# Altium PCB SH-C31A-V1.1.PcbDoc
Units mm, origin at the board's own origin, x right, y up, seen from the top; angles counter-clockwise.
Board outline 54.15 x 24.36 mm, 2 copper layers (Top Layer, Bottom Layer), stack 1.58 mm thick; 39 components, 25 nets, 144 pads, 46 vias.
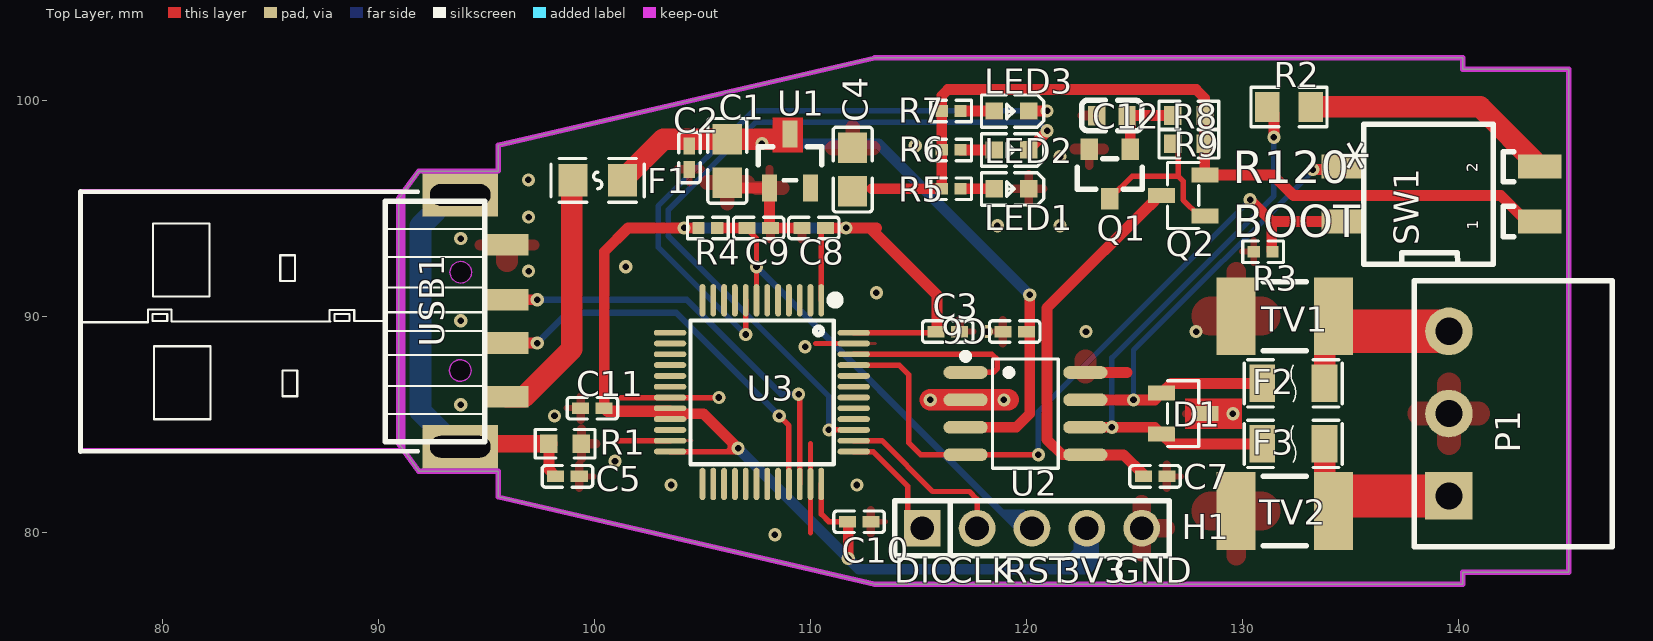
[diagram p0: Top Layer view]
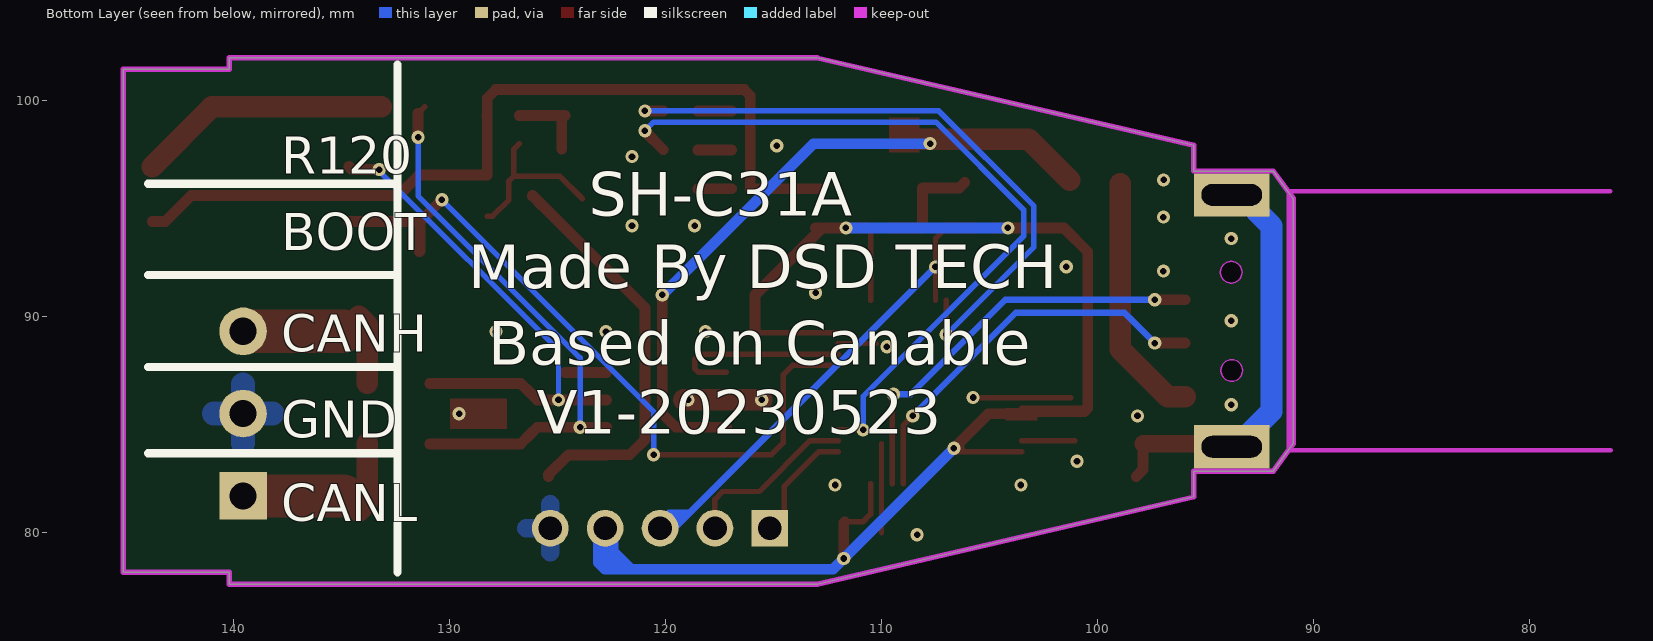
[diagram p1: Bottom Layer view, seen from below]

## Layer stack, top to bottom
Top Solder Mask Layer: solder mask 0.01, Dk 3.3
Top Layer: signal copper 0.035
Dielectric1: surface 1.51, FR4, Dk 4.5
Bottom Layer: signal copper 0.035
Bottom Solder Mask Layer: solder mask 0.01, Dk 3.3

## Board outline
90.964,84.111 90.964,95.464 91.879,96.734 95.562,96.734 95.562,97.928 112.986,101.967 113.901,101.967 140.215,101.967 140.215,101.433 145.117,101.433 145.117,78.167 140.215,78.167 140.215,77.608 112.986,77.608 95.562,81.647 95.562,82.841 91.879,82.841

## Design rules (kind name [scope] priority, off if disabled: settings)
BoardOutlineClearance Default [All] p0: genericclearance=0.254 ignorepadtopadclearanceinfootprint=FALSE except(0: Arc-SplitContinuation Track-SplitContinuation SMDPad-SplitContinuation THPad-SplitContinuation Via-SplitContinuation Fill-SplitContinuation Poly-SplitContinuation Region-SplitContinuation Text-SplitContinuation)
BoardOutlineClearance Plane_Default [All] p0: genericclearance=0.254 ignorepadtopadclearanceinfootprint=FALSE except(0: Arc-SplitContinuation Track-SplitContinuation SMDPad-SplitContinuation THPad-SplitContinuation Via-SplitContinuation Fill-SplitContinuation Poly-SplitContinuation Region-SplitContinuation Text-SplitContinuation)
BoardOutlineClearance Copper_gge7917 [All] p0: genericclearance=0.254 ignorepadtopadclearanceinfootprint=FALSE except(0: Arc-SplitContinuation Track-SplitContinuation SMDPad-SplitContinuation THPad-SplitContinuation Via-SplitContinuation Fill-SplitContinuation Poly-SplitContinuation Region-SplitContinuation Text-SplitContinuation)
BoardOutlineClearance Copper_gge7914 [All] p0: genericclearance=0.254 ignorepadtopadclearanceinfootprint=FALSE except(0: Arc-SplitContinuation Track-SplitContinuation SMDPad-SplitContinuation THPad-SplitContinuation Via-SplitContinuation Fill-SplitContinuation Poly-SplitContinuation Region-SplitContinuation Text-SplitContinuation)
BoardOutlineClearance otherClearance [All] p0: genericclearance=0.254 ignorepadtopadclearanceinfootprint=FALSE except(0: Arc-SplitContinuation Track-SplitContinuation SMDPad-SplitContinuation THPad-SplitContinuation Via-SplitContinuation Fill-SplitContinuation Poly-SplitContinuation Region-SplitContinuation Text-SplitContinuation)
Clearance Default [All] p1: gap=0.178 ignorepadtopadclearanceinfootprint=FALSE
Clearance Plane_Default [All] p1: gap=0.178 ignorepadtopadclearanceinfootprint=FALSE
Clearance Copper_gge7917 [All] p1: gap=0.178 ignorepadtopadclearanceinfootprint=FALSE
Clearance Copper_gge7914 [All] p1: gap=0.178 ignorepadtopadclearanceinfootprint=FALSE
Clearance otherClearance [All] p1: gap=0.178 ignorepadtopadclearanceinfootprint=FALSE
DiffPairsRouting differentialPair [All] p1: maxuncoupledlength=10 minlimit=6 maxlimit=Infinity mostfreqgap=6 toplayer_minwidth=5 toplayer_prefwidth=10 toplayer_maxwidth=100 bottomlayer_minwidth=5 bottomlayer_prefwidth=10 bottomlayer_maxwidth=100
PasteMaskExpansion pasteMaskExpansion [All] p1: expansion=0
PlaneConnect Default [All] p1: planeconnectstyle=Relief reliefexpansion=0.508 reliefentries=4 reliefconductorwidth=0 reliefairgap=0.254
PolygonConnect gge7917 [All] p1: connectstyle=Direct reliefentries=4 reliefconductorwidth=10 polygonreliefangle="90 Angle" airgapwidth=10
PolygonConnect gge7914 [All] p1: connectstyle=Relief reliefentries=4 reliefconductorwidth=0 polygonreliefangle="90 Angle" airgapwidth=10
RoutingVias Default [All] p1: viastyle="Through Hole" holewidth=12 minholewidth=12 maxholewidth=2362 width=12 minwidth=12 maxwidth=2362
SolderMaskExpansion solderMaskExpansion [IsVia] p1: useseparateexpansions=TRUE expansion=-1000 expansionbottom=-1000
SolderMaskExpansion solderMaskExpansion [All] p2: useseparateexpansions=TRUE expansion=4 expansionbottom=4
Width Default [All] p1: maxlimit=1000 minlimit=10 preferedwidth=10

## Components (designator, comment, footprint, x,y, rotation, side; value= is the part's Value field where it differs from the comment)
C1 "10uF" C0805_1 106.164,97.2 r90 top locked
C2 "100nF" C0402_2 104.409,97.355 r90 top locked
C3 "100nF" C0402_2 116.364,89.3 r180 top locked
C4 "10uF" C0805_1 111.964,96.8 r270 top locked
C5 "100nF" C0402_2 98.764,82.6 r180 top locked
C6 "100nF" C0402_2 119.464,89.3 r0 top locked
C7 "NC" C0402_2 125.964,82.6 r180 top locked
C8 "100nF" C0402_2 110.164,94.1 r0 top locked
C9 "100nF" C0402_2 107.614,94.1 r180 top locked
C10 "100nF" C0402_2 112.264,80.5 r180 top locked
C11 "100nF" C0402_2 99.919,85.755 r0 top locked
C12 "10uF" C0603_1 123.964,99.3 r0 top locked
D1 "" SOT-23-3_L2.9-W1.3-P1.90-LS2.4-BR 127.264,85.505 r180 top locked
F1 "" F0805 100.164,96.3 r0 top locked
F2 "SMD1206B020TF/24" F1206_1 132.364,86.905 r0 top locked
F3 "SMD1206B020TF/24" F1206_1 132.364,84.105 r0 top locked
H1 "" HDR-TH_5P-P2.54-V-M 120.264,80.2 r0 top locked
LED1 "" LED0603-RD_RED_1 119.32,95.911 r180 top locked
LED2 "" LED0603-RD 119.32,97.711 r180 top locked
LED3 "" LED0603-RD 119.32,99.511 r180 top locked
P1 "WJ15EDGRC-3.81-3P" CONN-TH_3P-P3.81_WJ15EDGRC-3.81-3P 139.564,85.505 r90 top locked
Q1 "S8050" SOT-23_L2.9-W1.3-P1.90-LS2.4-BR 123.864,96.6 r90 top locked
Q2 "SI2301" SOT-23-3_L2.9-W1.3-P1.90-LS2.4-BR_2 127.264,95.6 r0 top locked
R1 "" R0603 98.657,84.107 r180 top locked
R2 "" R0805 132.164,99.7 r0 top locked
R3 "" R0402 130.964,93 r0 top locked
R4 "" R0402 105.264,94.1 r180 top locked
R5 "" R0402 116.52,95.911 r0 top locked
R6 "" R0402 116.52,97.711 r0 top locked
R7 "" R0402 116.52,99.511 r0 top locked
R8 "" R0603 127.531,99.3 r0 top locked
R9 "100kΩ" R0603 127.531,98 r0 top locked
SW1 "" SW-SMD_4P-L6.5-W6.0-P2.54-LS9.8 139.217,95.667 r90 top locked
TV1 "" DIO-DT-SMD_L4.5-W3.2 131.964,90.015 r180 top locked
TV2 "" DIO-DT-SMD_L4.5-W3.2 131.964,80.995 r180 top locked
U1 "ME6209A33M3G" SOT-23(SOT-23-3) 109.064,97.2 r0 top locked
U2 "TJA1051T/3,118" SOIC-8_L4.9-W3.9-P1.27-LS6.0-BL 119.964,85.505 r270 top locked
U3 "STM32G431C8T6TR" LQFP-48_L7.0-W7.0-P0.50-LS9.0-BL_1 107.764,86.5 r180 top locked
USB1 "" USB-A-SMD_U-G-04WS-W-01 94.884,89.8 r180 top locked

## Footprints (in the part's own frame and the unit in brackets; to place one, negate y for a bottom-side part, rotate by r counter-clockwise, add the part's x,y. Pads: shape width x height; smd on the part's side, far side on the other; paste and mask are expansions set on the pad)
C0402_2 [mm]
  rect 0.79x0.54 smd paste-100 mask+0.051: 1(-0.545,0) 2(0.545,0)
  silkscreen extent -1.17,-0.5 1.17,0.5
C0603_1 [mm]
  rect 0.8x0.9 smd paste+0 mask+0.051: 1(-0.7,0) 2(0.7,0)
  silkscreen extent -1.41,-0.71 1.39,0.72
C0805_1 [mm]
  rect 1.41x1.35 smd paste-100 mask+0.051: 1(-1,0) 2(1,0)
  silkscreen extent -1.96,-0.9 1.96,0.9
CONN-TH_3P-P3.81_WJ15EDGRC-3.81-3P [mm]
  rect 2.2x2.2 hole 1.26 paste+0 mask+0.051: 1(-3.81,0)
  round 2.2 hole 1.26 paste+0 mask+0.051: 2(0,0) 3(3.81,0)
  silkscreen extent -6.15,-7.55 6.15,1.6
DIO-DT-SMD_L4.5-W3.2 [mm]
  rect 1.8x3.6 smd paste+0 mask+0.051: 1(-2.25,0) 2(2.25,0)
  silkscreen extent -1,-1.6 1,1.6
F0805 [mm]
  rect 1.335x1.5 smd paste-100 mask+0.051: 1(-1.142,0) 2(1.142,0)
  silkscreen extent -2.16,-1.02 2.16,1.02
F1206_1 [mm]
  rect 1.19x1.728 smd paste+0 mask+0.051: 1(-1.445,0) 2(1.445,0)
  silkscreen extent -2.27,-1.09 2.27,1.09
HDR-TH_5P-P2.54-V-M [mm]
  rect 1.7x1.7 hole 1.1 paste+0 mask+0.051: 1(-5.08,0)
  round 1.7 hole 1.1 paste+0 mask+0.051: 2(-2.54,0) 3(0,0) 4(2.54,0) 5(5.08,0)
  silkscreen extent -6.35,-1.27 6.35,1.27
LED0603-RD [mm]
  rect 0.8x0.8 smd paste+0 mask+0.051: 1(-0.799,-0.003) 2(0.799,0.003)
  silkscreen extent -1.49,-0.75 1.39,0.76
LED0603-RD_RED_1 [mm]
  rect 0.8x0.8 smd paste+0 mask+0.051: 1(-0.8,-0.003) 2(0.8,0.003)
  silkscreen extent -1.49,-0.75 1.39,0.76
LQFP-48_L7.0-W7.0-P0.50-LS9.0-BL_1 [mm]
  oval 0.27x1.5 smd paste+0 mask+0.05: 1(-2.75,-4.25) 2(-2.25,-4.25) 3(-1.75,-4.25) 4(-1.25,-4.25) 5(-0.75,-4.25) 6(-0.25,-4.25) 7(0.25,-4.25) 8(0.75,-4.25) 9(1.25,-4.25) 10(1.75,-4.25) 11(2.25,-4.25) 12(2.75,-4.25) 25(2.75,4.25) 26(2.25,4.25) 27(1.75,4.25) 28(1.25,4.25) 29(0.75,4.25) 30(0.25,4.25) 31(-0.25,4.25) 32(-0.75,4.25) 33(-1.25,4.25) 34(-1.75,4.25) 35(-2.25,4.25) 36(-2.75,4.25)
  oval 1.5x0.27 smd paste+0 mask+0.05: 13(4.25,-2.75) 14(4.25,-2.25) 15(4.25,-1.75) 16(4.25,-1.25) 17(4.25,-0.75) 18(4.25,-0.25) 19(4.25,0.25) 20(4.25,0.75) 21(4.25,1.25) 22(4.25,1.75) 23(4.25,2.25) 24(4.25,2.75) 37(-4.25,2.75) 38(-4.25,2.25) 39(-4.25,1.75) 40(-4.25,1.25) 41(-4.25,0.75) 42(-4.25,0.25) 43(-4.25,-0.25) 44(-4.25,-0.75) 45(-4.25,-1.25) 46(-4.25,-1.75) 47(-4.25,-2.25) 48(-4.25,-2.75)
  silkscreen extent -3.59,-4.46 3.3,3.34
R0402 [mm]
  rect 0.566x0.54 smd paste-100 mask+0.051: 1(-0.433,0) 2(0.433,0)
  silkscreen extent -0.94,-0.5 0.94,0.5
R0603 [mm]
  rect 0.806x0.864 smd paste-100 mask+0.051: 1(-0.753,0) 2(0.753,0)
  silkscreen extent -1.39,-0.66 1.39,0.66
R0805 [mm]
  rect 1.133x1.377 smd paste-100 mask+0.051: 1(-1,0) 2(1,0)
  silkscreen extent -1.76,-0.92 1.76,0.92
SOIC-8_L4.9-W3.9-P1.27-LS6.0-BL [mm]
  oval 0.588x2.045 smd paste+0 mask+0.051: 1(-1.905,-2.772) 2(-0.635,-2.772) 3(0.635,-2.772) 4(1.905,-2.772) 5(1.905,2.772) 6(0.635,2.772) 7(-0.635,2.772) 8(-1.905,2.772)
  silkscreen extent -2.8,-2.92 2.53,1.52
SOT-23(SOT-23-3) [mm]
  rect 0.7x1.25 smd paste+0 mask+0.102: 1(-0.95,-1.25) 2(0.95,-1.25) 3(0,1.25)
  silkscreen extent -1.46,-0.9 1.46,0.65
SOT-23-3_L2.9-W1.3-P1.90-LS2.4-BR [mm]
  rect 1.25x0.7 smd paste+0 mask+0.051: 1(1,-0.95) 2(1,0.95) 3(-1,0)
  silkscreen extent -0.73,-1.53 0.73,1.53
SOT-23-3_L2.9-W1.3-P1.90-LS2.4-BR_2 [mm]
  rect 1.25x0.7 smd paste+0 mask+0.051: 1(1,-0.95) 2(1,0.95) 3(-1,0)
  silkscreen extent -0.73,-1.53 0.73,1.53
SOT-23_L2.9-W1.3-P1.90-LS2.4-BR [mm]
  rect 1x0.8 smd paste+0 mask+0.051: 1(1.15,-0.95) 2(1.15,0.95) 3(-1.15,0)
  silkscreen extent -0.7,-1.5 0.7,1.5
SW-SMD_4P-L6.5-W6.0-P2.54-LS9.8 [mm]
  rect 1.1x2 smd paste+0 mask+0.051: 1(-1.27,-4.55) 2(1.27,-4.55) 3(1.27,4.55) 4(-1.27,4.55)
  silkscreen extent -3.24,-3.35 3.24,3.6
USB-A-SMD_U-G-04WS-W-01 [mm]
  rect 2x1 smd paste-100 mask+0.051: 1(-1.082,3.518) 2(-1.082,1.029) 3(-1.082,-0.978) 4(-1.082,-3.518)
  rect 3.5x2 hole 1 slot 2.8 at 0 deg paste+0 mask+0.051: 5(1.082,5.829) 6(1.082,-5.829)
  Board Outline Layer circle w0.003: c1.082,2.299 r0.5
  Board Outline Layer circle w0.003: c1.057,-2.248 r0.5
  Board Outline Layer lines w0.2: 18.625,5.994 3.715,5.994 3.715,-5.994 18.599,-5.994
  Board Outline Layer region: 0.582,2.299 0.631,2.516 0.77,2.69 0.971,2.786 1.193,2.786 1.394,2.69 1.532,2.516 1.582,2.299 1.582,2.299 1.532,2.082 1.394,1.908 1.193,1.811 0.971,1.811 0.77,1.908 0.631,2.082 0.582,2.299
  Board Outline Layer region: 0.582,2.299 0.592,2.397 0.62,2.49 0.666,2.577 0.728,2.653 0.804,2.715 0.891,2.761 0.984,2.789 1.082,2.799 1.179,2.789 1.273,2.761 1.36,2.715 1.435,2.653 1.498,2.577 1.544,2.49 1.572,2.397 1.582,2.299 1.572,2.201 1.544,2.108 1.498,2.021 1.435,1.945 1.36,1.883 1.273,1.837 1.179,1.809 1.082,1.799 0.984,1.809 0.891,1.837 0.804,1.883 0.728,1.945 0.666,2.021 0.62,2.108 0.592,2.201
  Board Outline Layer region: 0.557,-2.248 0.606,-2.031 0.745,-1.857 0.945,-1.76 1.168,-1.76 1.368,-1.857 1.507,-2.031 1.557,-2.248 1.557,-2.248 1.507,-2.465 1.368,-2.639 1.168,-2.735 0.945,-2.735 0.745,-2.639 0.606,-2.465 0.557,-2.248
  Board Outline Layer region: 0.557,-2.248 0.566,-2.15 0.595,-2.056 0.641,-1.97 0.703,-1.894 0.779,-1.832 0.865,-1.786 0.959,-1.757 1.057,-1.748 1.154,-1.757 1.248,-1.786 1.334,-1.832 1.41,-1.894 1.472,-1.97 1.518,-2.056 1.547,-2.15 1.557,-2.248 1.547,-2.345 1.518,-2.439 1.472,-2.525 1.41,-2.601 1.334,-2.663 1.248,-2.71 1.154,-2.738 1.057,-2.748 0.959,-2.738 0.865,-2.71 0.779,-2.663 0.703,-2.601 0.641,-2.525 0.595,-2.439 0.566,-2.345
  Multi-Layer board cut-out: 0.582,2.299 0.631,2.516 0.77,2.69 0.971,2.786 1.193,2.786 1.394,2.69 1.532,2.516 1.582,2.299 1.582,2.299 1.532,2.082 1.394,1.908 1.193,1.811 0.971,1.811 0.77,1.908 0.631,2.082 0.582,2.299
  Multi-Layer board cut-out: 0.557,-2.248 0.606,-2.031 0.745,-1.857 0.945,-1.76 1.168,-1.76 1.368,-1.857 1.507,-2.031 1.557,-2.248 1.557,-2.248 1.507,-2.465 1.368,-2.639 1.168,-2.735 0.945,-2.735 0.745,-2.639 0.606,-2.465 0.557,-2.248
  silkscreen extent -0.06,-5.97 18.68,6.03

## Via types
v1: diameter 0.61, hole 0.305, Top Layer to Bottom Layer, 46 vias

## Nets (pads, with @x,y where several pads share a name; then routed paths per layer and width w, separated by ;. In a path a pad name is that pad's centre, name@x,y a point inside that pad or via, vN(x,y) a via of type N, cw(c..) or ccw(c..) an arc to the next point about the centre after c; other vN are vias at no path point)
$C5_2: C5.2 R1.2 USB1.5 USB1.6 | length 19.3
  Top Layer w0.5: R1.2 97.904,82.915 C5.2
  Top Layer w0.8: USB1.5 93.939,84.107 R1.2
  Bottom Layer w1.016: USB1.5 93.602,83.971 91.964,85.609 91.964,94.191 93.402,95.629 USB1.6
$C12_2: C12.2 Q1.1 R8.1 | length 3.7
  Top Layer w0.5: Q1.1 124.814,99.15 C12.2 R8.1
$F2_2: F2.2 P1.3 TV1.1 | length 7.8
  Top Layer w1: F2.2 133.809,89.61 TV1.1
  Top Layer w2: TV1.1@134.914,89.315 P1.3@139.464,89.315
$F3_2: F3.2 P1.1 TV2.1 | length 7.8
  Top Layer w1: F3.2 133.809,81.4 TV2.1
  Top Layer w2: TV2.1@134.914,81.695 P1.1@139.464,81.695
$LED1_2: LED1.2 R5.2 | length 1.6
  Top Layer w0.5: R5.2 118.517,95.911 LED1.2
$LED2_2: LED2.2 R6.2 | length 1.6
  Top Layer w0.5: R6.2 118.517,97.711 LED2.2
$LED3_2: LED3.2 R7.2 | length 1.6
  Top Layer w0.5: R7.2 116.956,99.507 LED3.2
$Q1_3: Q1.3 Q2.1 R9.1 | length 7.7
  Top Layer w0.254: Q1.3 124.914,96.5 127.031,96.5 ; R9.1 127.031,97.746 127.031,96.5 ; Q2.1 128.014,94.65 127.264,95.4 127.264,96.267 127.031,96.5
$R2_2: R2.2 SW1.2 | length 11.7
  Top Layer w1: R2.2 141.004,99.7 SW1.2
+3V3: C3.2 C4.2 C8.2 C10.2 C11.2 H1.4 Q2.2 R4.2 R5.1 R6.1 R7.1 R8.2 R9.2 SW1.1 U1.2 U3.1 U3.20 U3.21 U3.24 U3.36 U3.48 | length 120.6
  Top Layer w0.254: C11.2@100.469,85.75 U3.20 ; U3.24 106.181,83.75 ; 106.289,84.275 106.289,83.858 106.181,83.75 ; v1(106.664,83.9) 106.514,83.75 106.181,83.75 ; U3.36 110.514,80.85 110.864,80.5 C10.2 ; U3.1 110.514,93.905 C8.2 ; U3.48 C3.2@115.714,89.25
  Top Layer w0.5: 102.964,85.6 100.619,85.6 100.469,85.75 C11.2 100.464,93 101.564,94.1 v1(104.164,94.1) R4.2 ; 103.564,85.5 105.064,85.5 106.289,84.275 v1(106.664,83.9) ; C8.2 v1(111.664,94.1) 112.764,94.1 ; C10.2 111.764,80.455 v1(111.764,78.8) ; 112.864,95.911 R5.1 R6.1 R7.1 116.087,100.218 116.369,100.5 127.864,100.5 128.264,100.1 R8.2@128.264,99.28 ; 113.064,94.1 112.764,94.1 ; C3.2 115.864,89.345 115.864,91 112.764,94.1 ; R8.2 R8.2@128.264,99.28 ; SW1.1 143.167,94.397 141.964,95.6 132.364,95.6 131.414,96.55 Q2.2 R8.2@128.264,99.28
  Bottom Layer w0.5: v1(104.164,94.1) v1(111.664,94.1) ; v1(106.664,83.9) v1(111.764,78.8) 112.264,78.3 121.605,78.3 ; 121.605,78.3 122.066,78.761 ; 121.605,78.3 122.066,78.3 ; 122.066,78.3 122.428,78.3 ; 122.066,78.3 122.066,78.761 ; 122.066,78.761 122.428,79.123 ; 122.428,78.3 122.807,78.3 ; 122.428,78.3 122.428,79.123 ; 122.428,79.123 122.804,79.499 H1.4@122.804,80.1 ; 122.428,79.123 H1.4@122.428,79.724 ; H1.4@122.428,79.724 122.428,79.824 H1.4 ; H1.4@122.428,79.724 H1.4@122.804,80.1 ; H1.4@122.804,80.1 122.807,80.097 122.807,78.3 ; H1.4@122.804,80.1 H1.4 ; H1.4 123.124,79.88 123.124,78.616 122.807,78.3
+3V3A: C7.2 Q2.3 U2.5 | length 19.7
  Top Layer w0.254: 125.793,95.229 125.793,95.029 126.264,95.5 Q2.3 Q2.3@126.164,95.6
  Top Layer w0.5: U2.5 121.664,83.6 120.964,84.3 120.964,90.4 Q2.3@126.164,95.6
  Top Layer w0.508: U2.5 124.501,83.6 125.419,82.682 C7.2
+5V: C1.2 C2.2 C6.2 F1.2 U1.3 U2.3 | length 32.7
  Top Layer w0.5: U2.3 119.534,84.87 120.164,85.5 v1(120.164,91)
  Top Layer w1: F1.2 103.207,98.2 C1.2 107.764,98.2 108.814,98.2 U1.3
  Bottom Layer w0.5: v1(107.764,98) 113.164,98 v1(120.164,91)
CAN_H: D1.1 F2.1 SW1.3 U2.7 | length 24.1
  Top Layer w0.5: U2.7 v1(124.964,86.14) 125.949,86.14 D1.1 126.714,86.905 F2.1
  Top Layer w0.508: v1(133.264,96.8) 134.53,96.8 SW1.3
  Bottom Layer w0.254: v1(124.964,86.14) 124.964,88.439 133.264,96.739 v1(133.264,96.8)
CAN_L: D1.2 F3.1 R2.1 U2.6 | length 26.6
  Top Layer w0.254: R2.1 R2.1@131.464,99.4
  Top Layer w0.5: U2.6 v1(123.964,84.87) 125.949,84.87 D1.2 126.714,84.105 F3.1
  Top Layer w0.508: v1(131.464,98.3) R2.1@131.464,99.4
  Bottom Layer w0.254: v1(123.964,84.87) 123.964,88.086 131.464,95.586 v1(131.464,98.3)
CAN_RXD: R3.2 SW1.4 U2.4 U3.45 | length 34.1
  Top Layer w0.254: U3.45 114.114,87.75 114.564,87.3 114.564,84.154 115.118,83.6 U2.4 v1(120.564,83.6)
  Top Layer w0.5: v1(130.364,95.4) 131.367,94.397 ; R3.2 131.367,93.03 131.367,94.397 ; SW1.4 131.367,94.397
  Bottom Layer w0.254: v1(120.564,83.6) 120.564,85.6 v1(130.364,95.4)
CAN_TXD: U2.1 U3.46 | length 8.7
  Top Layer w0.254: U3.46 118.414,88.25 118.664,88 118.664,87.6 118.474,87.41 U2.1
GND: C1.1 C2.1 C3.1 C4.1 C5.1 C6.1 C7.1 C8.1 C9.1 C10.1 C11.1 C12.1 D1.3 H1.5 LED1.1 P1.2 Q1.2 R1.1 R3.1 TV1.2 TV2.2 U1.1 U2.2 U2.8 U3.19 U3.23 U3.35 U3.47 USB1.4 | length 23.9
  Top Layer w0.254: 101.064,84.25 U3.23 ; 101.264,86.25 U3.19 v1@105.964,86.25 ; 110.014,80 U3.35 110.014,84.1 ; 110.264,88.75 U3.47
  Top Layer w0.5: C1.1 106.414,95.95 U1.1 108.114,94.145 C9.1 C8.1 ; U2.8 124.664,87.41
  Top Layer w1: v1(115.553,86.14) U2.2 v1@119.164,86.14
  other v1: 108.364,79.9 103.564,82.2 112.164,82.2 100.964,83.3 98.164,85.4 129.564,85.5 93.828,85.917 118.964,86.14 105.774,86.25 109.764,88.6 118.164,89.3 122.764,89.3 127.864,89.3 93.824,89.8 113.064,91.1 96.964,92.1 101.464,92.3 93.828,93.607 118.664,94.2 121.564,94.2 96.964,94.6 96.954,96.32 121.564,97.4 114.864,97.9
JL-SWCLK: H1.2 U3.38 | length 8.2
  Top Layer w0.254: U3.38 113.316,84.25 115.666,81.9 117.364,81.9 117.724,81.54 H1.2
JL-SWDIO: H1.1 U3.37 | length 5.6
  Top Layer w0.254: U3.37 112.914,83.75 114.514,82.15 114.514,80.55 114.864,80.2 H1.1
LED1: LED2.1 U3.39 | length 35
  Top Layer w0.254: v1(110.864,84.75) U3.39
  Top Layer w0.5: LED2.1 120.964,98.559 v1(120.964,98.6)
  Bottom Layer w0.254: v1@110.864,84.8 110.864,86.3 103.429,93.735 103.429,94.933 107.497,99 120.564,99 v1(120.964,98.6)
LED2: LED3.1 U3.8 | length 29.8
  Top Layer w0.254: v1@107.014,89.292 U3.8
  Top Layer w0.5: LED3.1 v1(120.964,99.514)
  Bottom Layer w0.254: v1(107.014,89.165) 102.964,93.215 102.964,95.114 107.364,99.514 v1(120.964,99.514)
NRST: C9.2 H1.3 R4.1 U3.7 | length 25.5
  Top Layer w0.254: C9.2@107.019,94.109 107.028,94.1 107.514,93.614 v1(107.514,92.296) U3.7
  Top Layer w0.5: R4.1 107.028,94.1 C9.2
  Bottom Layer w0.3: v1(107.514,92.296) 118.905,80.905 ; H1.3@120.264,80.274 H1.3 ; 118.905,80.905 119.204,80.607 ; 118.905,80.905 119.858,80.905 H1.3@119.858,80.607 ; 119.204,80.607 H1.3@119.858,80.607 ; 119.204,80.607 119.937,79.873 H1.3 ; H1.3@119.858,80.607 H1.3
USBDM: U3.33 USB1.2 | length 18.5
  Top Layer w0.254: v1(108.564,85.4) 109.014,84.95 U3.33
  Top Layer w0.5: USB1.2 v1(97.364,88.771)
  Bottom Layer w0.3: v1(97.364,88.771) 98.764,90.171 103.796,90.171 108.564,85.403 v1(108.564,85.4)
USBDP: U3.34 USB1.3 | length 19.5
  Top Layer w0.254: v1(109.464,86.4) 109.514,86.35 U3.34
  Top Layer w0.5: USB1.3 v1(97.364,90.778)
  Bottom Layer w0.3: v1(97.364,90.778) 104.286,90.778 108.664,86.4 v1(109.464,86.4)
VBUS: F1.1 USB1.1 | length 11.6
  Top Layer w1: USB1.1 96.766,86.282 98.964,88.48 F1.1@98.964,96.143
pads on no net: U3.2 U3.3 U3.4 U3.5 U3.6 U3.9 U3.10 U3.11 U3.12 U3.13 U3.14 U3.15 U3.16 U3.17 U3.18 U3.22 U3.25 U3.26 U3.27 U3.28 U3.29 U3.30 U3.31 U3.32 U3.40 U3.41 U3.42 U3.43 U3.44

## Polygon pours and split planes (outlines as drawn)
+3V3 on Top Layer (solid, remove dead copper, pour order 0): 109.564,96.7 113.564,96.7 113.764,96.5 113.764,93.4 113.664,93.3 110.464,93.3 110.264,93.5 110.264,94.8 110.064,95 109.464,95 109.364,95.1 109.364,96.5
GND on Bottom Layer (solid, remove dead copper, pour order 6): 91.063,102.401 91.063,77.601 144.962,77.601 144.962,102.401
GND on Top Layer (solid, remove dead copper, pour order 4): 90.864,102 90.864,76.2 145.164,76.2 145.164,102

## Keep-outs
Board Outline Layer:
  the board outline again, w0.254

## Other copper
Top Layer:
  region net +3V3: 102.808,85.75 102.808,85.197 104.264,85.197 104.264,85.75
  region net +5V: 108.264,99.2 108.264,97.6 109.664,97.6 109.664,99.2
  region net GND: 127.364,86.187 127.364,84.8 129.964,84.8 129.964,86.187

## Silkscreen, mask and mechanical layers (free items; w line width, h text height)
Top Silkscreen Layer:
  text "R120" at 129.567,96.167 h1.5
  text "BOOT" at 129.567,93.667 h1.5
  text "DIO" at 113.897,77.672 h1.14
  text "CLK" at 116.437,77.672 h1.14
  text "RST" at 118.977,77.672 h1.14
  text "3V3" at 121.517,77.672 h1.14
  text "GND" at 124.057,77.672 h1.14
Bottom Silkscreen Layer:
  lines w0.381: 132.417,78.167 132.417,101.667 ; 132.514,83.667 143.964,83.667 ; 132.514,87.667 143.964,87.667 ; 132.514,91.92 143.964,91.92 ; 132.514,96.146 143.964,96.146
  text "R120" at 137.794,96.617 h1.7
  text "SH-C31A" at 123.567,94.667 h2.03
  text "BOOT" at 137.791,93.057 h1.7
  text "Made By DSD TECH" at 129.147,91.307 h2.03
  text "CANH" at 137.791,88.357 h1.7
  text "Based on Canable" at 128.227,87.767 h2.03
  text "V1-20230523" at 125.967,84.577 h2.03
  text "GND" at 137.791,84.387 h1.7
  text "CANL" at 137.791,80.517 h1.7

## Text inside footprints (layer, text, board x,y; h text height)
SW1: Top Silkscreen Layer "1" at 140.917,94.013 h0.5 r90; Top Silkscreen Layer "*" at 136.669,96.748 h2.03 r90; Top Silkscreen Layer "2" at 140.909,96.668 h0.5 r90